# EAGLE board Qwiic_TCA9534-Panel (EAGLE 7.7.0), part 1 of 2
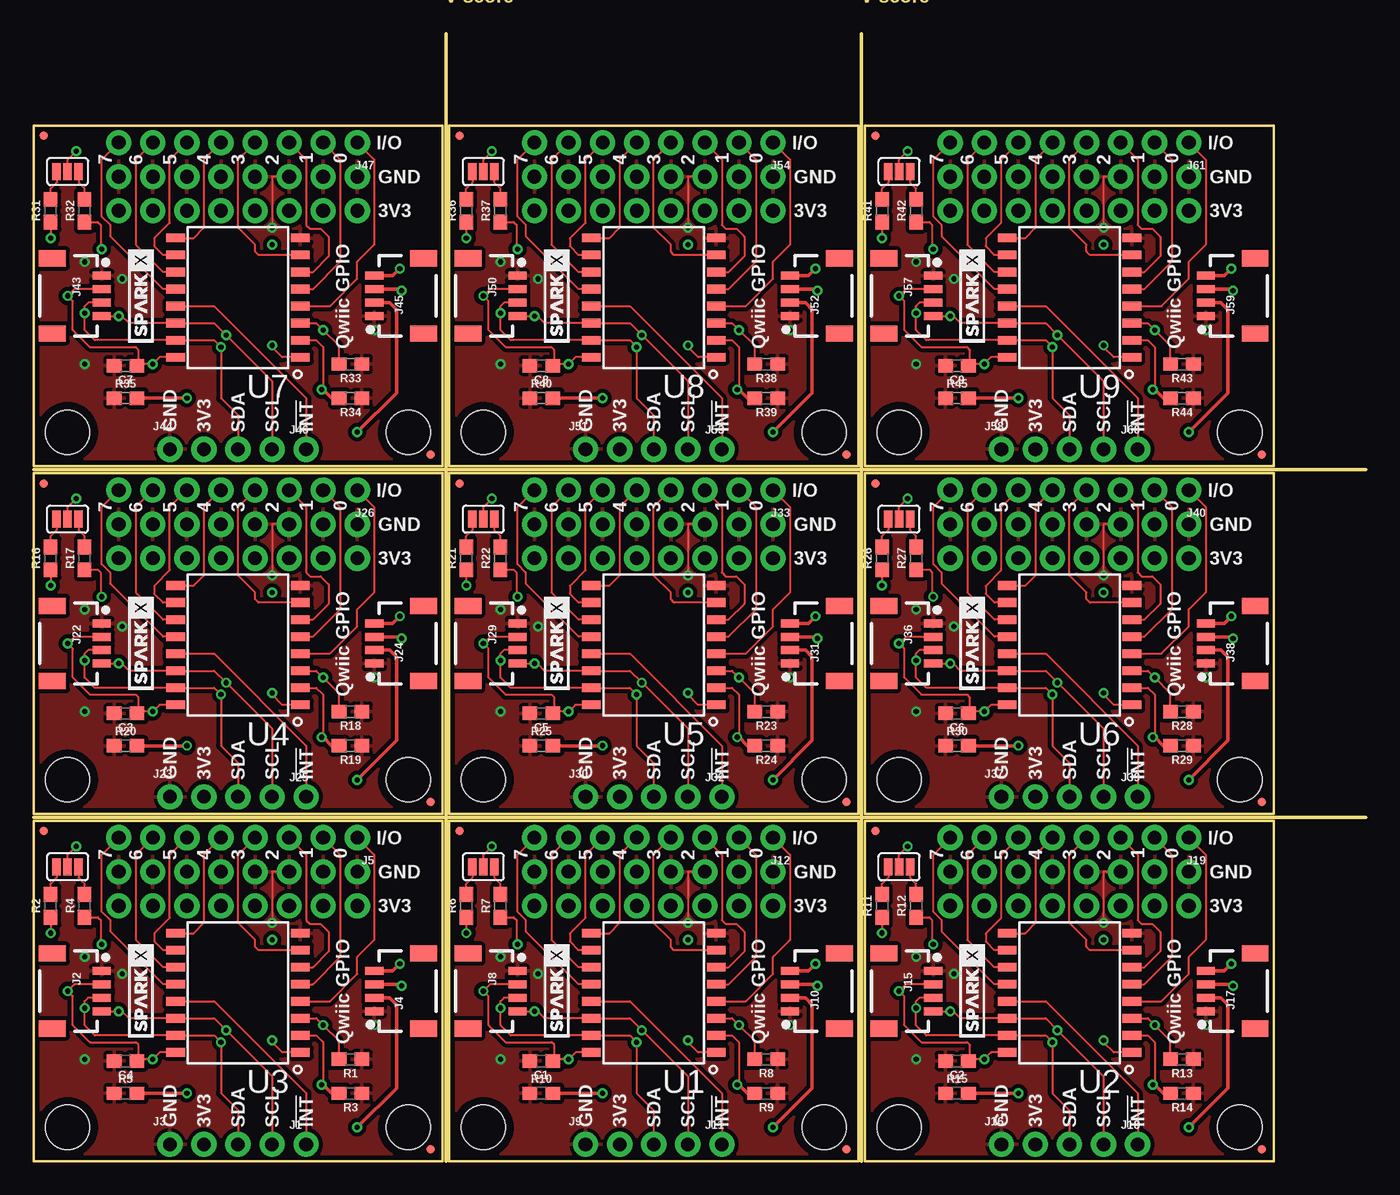
[diagram p0: board, top side]
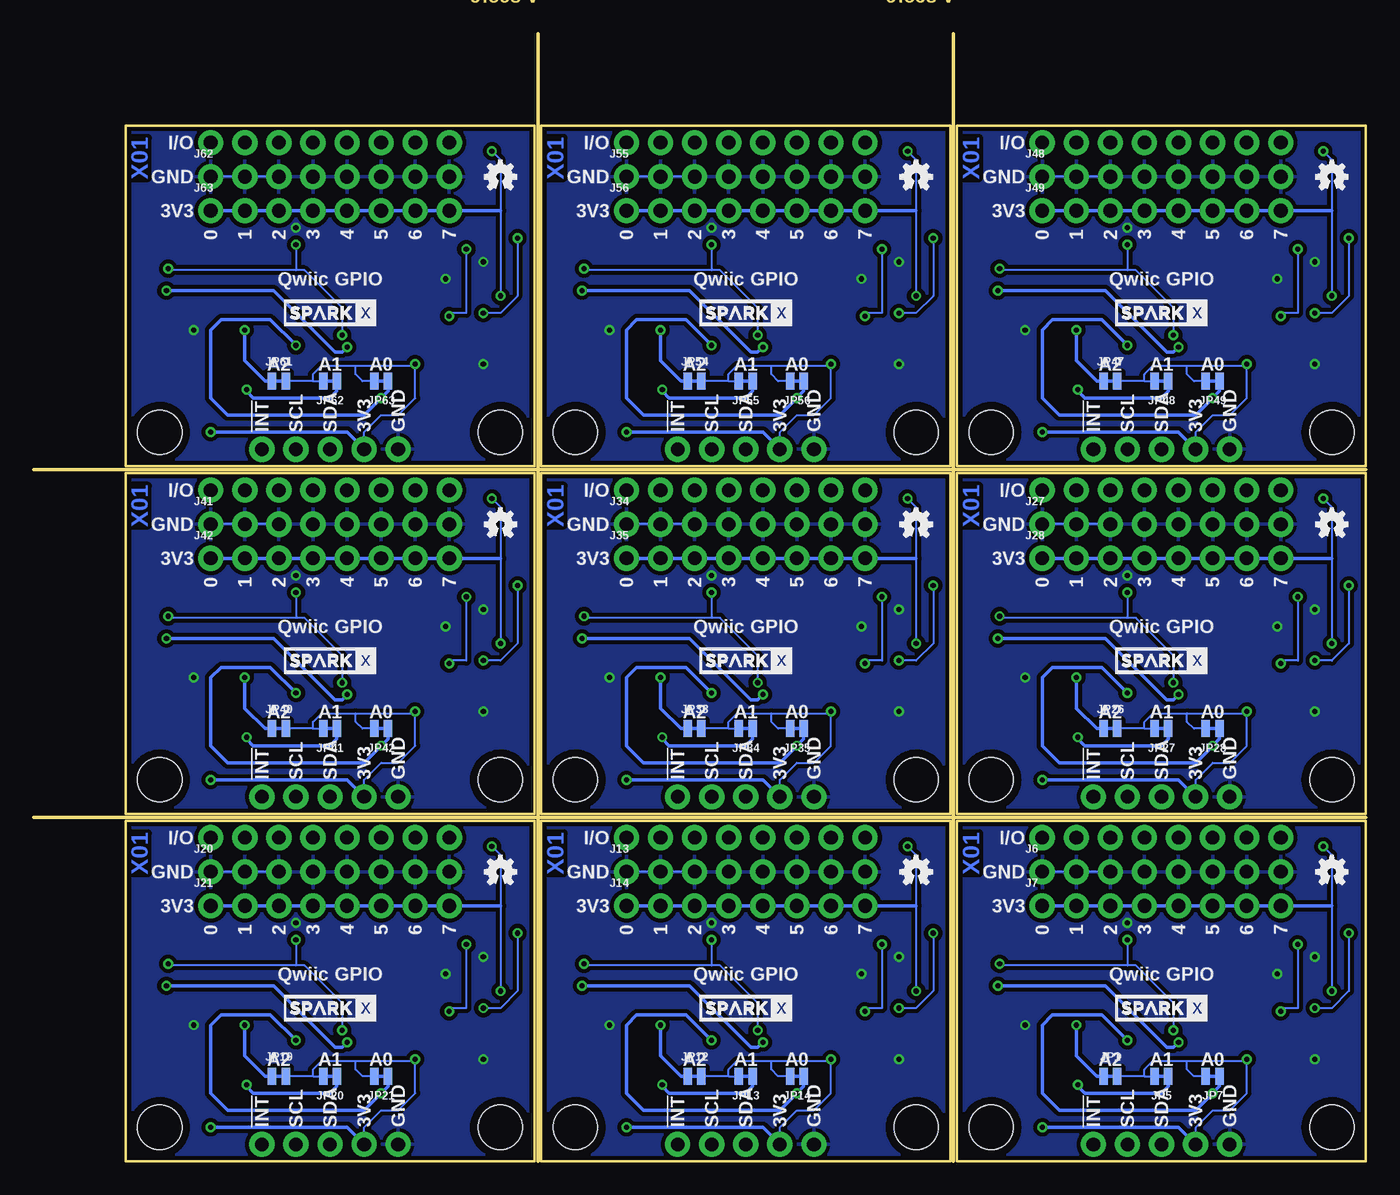
[diagram p1: board, bottom side, seen from below]

Size 99.31 x 84.07 mm. Coordinates in mm from the lower left corner, seen from the top.
Outline: 30.73,0 30.73,84.07
Outline: 61.72,0 61.72,84.07
Outline: 0,25.65 99.31,25.65
Outline: 0,51.56 99.31,51.56
Outline: 0,25.4 30.48,25.4 30.48,0 0,0 0,25.4
Outline: 30.99,25.4 61.47,25.4 61.47,0 30.99,0 30.99,25.4
Outline: 61.98,25.4 92.46,25.4 92.46,0 61.98,0 61.98,25.4
Outline: 0,51.31 30.48,51.31 30.48,25.91 0,25.91 0,51.31
Outline: 30.99,51.31 61.47,51.31 61.47,25.91 30.99,25.91 30.99,51.31
Outline: 61.98,51.31 92.46,51.31 92.46,25.91 61.98,25.91 61.98,51.31
Outline: 0,77.22 30.48,77.22 30.48,51.82 0,51.82 0,77.22
Outline: 30.99,77.22 61.47,77.22 61.47,51.82 30.99,51.82 30.99,77.22
Outline: 61.98,77.22 92.46,77.22 92.46,51.82 61.98,51.82 61.98,77.22
Copper layers (1*16): Top 0.035mm / dielectric 1.5mm / Bottom 0.035mm
Design rules "SparkFun-2-layer-PCBWay-LIMIT": minimum track width 6mil, minimum drill 0.3mm, track to track 6mil, track to pad 6mil, pad to pad 6mil, via to via 6mil, smd to smd 6mil, copper to edge 6mil, drill to drill 6mil, minimum pad ring 7mil, minimum via ring 7mil, stop-mask expansion 4mil, vias tented up to drill 25mil, thermal gap 10mil

## Footprints (pad centres in the part's own frame; a part is rotated, then mirrored left to right if it is on the bottom)
0603 = smd 1.1 x 1: 1 -0.85,0; 2 0.85,0
1X01_NO_SILK = drill 1.016 pad 1.88: 1 0,0
1X04_1MM_RA = smd 0.6 x 1.35: 1 -1.5,0; 2 -0.5,0; 3 0.5,0; 4 1.5,0 | smd 1.2 x 2: NC1 2.8,-3.675; NC2 -2.8,-3.675
1X04_NO_SILK = drill 1.016 pad 1.88: 1 0,0; 2 2.54,0; 3 5.08,0; 4 7.62,0
1X08_NO_SILK = drill 1.016 pad 1.88: 1 0,0; 2 2.54,0; 3 5.08,0; 4 7.62,0; 5 10.16,0; 6 12.7,0; 7 15.24,0; 8 17.78,0
SMT-JUMPER_2_NC_TRACE_NO-SILK = smd 0.635 x 1.27: 1 -0.508,0; 2 0.508,0
MICRO-FIDUCIAL = smd 0.635 x 0.635: 1 0,0
STAND-OFF = hole 3.302: 0,0
SMT-JUMPER_3-2-NC-PASTE_SILK_TALLER_A = smd 0.635 x 1.27: 1 -0.813,0; 2 0,0; 3 0.813,0
16SOIC = smd 1.397 x 0.648: 1 -4.65,4.445; 2 -4.65,3.175; 3 -4.65,1.905; 4 -4.65,0.635; 5 -4.65,-0.635; 6 -4.65,-1.905; 7 -4.65,-3.175; 8 -4.65,-4.445; 9 4.65,-4.445; 10 4.65,-3.175; 11 4.65,-1.905; 12 4.65,-0.635; 13 4.65,0.635; 14 4.65,1.905; 15 4.65,3.175; 16 4.65,4.445

## Placement (x,y rotation side)
C1  0.1uF  [0603]  37.85,7.49 180 top
C2  0.1uF  [0603]  68.83,7.49 180 top
C3  0.1uF  [0603]  6.86,33.4 180 top
C4  0.1uF  [0603]  6.86,7.49 180 top
C5  0.1uF  [0603]  37.85,33.4 180 top
C6  0.1uF  [0603]  68.83,33.4 180 top
C7  0.1uF  [0603]  6.86,59.31 180 top
C8  0.1uF  [0603]  37.85,59.31 180 top
C9  0.1uF  [0603]  68.83,59.31 180 top
J1  [1X01_NO_SILK]  20.32,1.27 0 top
J2  SMD  [1X04_1MM_RA]  5.08,12.7 270 top
J3  PTH  [1X04_NO_SILK]  10.16,1.27 0 top
J4  SMD  [1X04_1MM_RA]  25.4,12.7 90 top
J5  [1X08_NO_SILK]  24.13,24.13 180 top
J6  [1X08_NO_SILK]  24.13,21.59 0 bottom
J7  [1X08_NO_SILK]  24.13,19.05 0 bottom
J8  SMD  [1X04_1MM_RA]  36.07,12.7 270 top
J9  PTH  [1X04_NO_SILK]  41.15,1.27 0 top
J10  SMD  [1X04_1MM_RA]  56.39,12.7 90 top
J11  [1X01_NO_SILK]  51.31,1.27 0 top
J12  [1X08_NO_SILK]  55.12,24.13 180 top
J13  [1X08_NO_SILK]  55.12,21.59 0 bottom
J14  [1X08_NO_SILK]  55.12,19.05 0 bottom
J15  SMD  [1X04_1MM_RA]  67.06,12.7 270 top
J16  PTH  [1X04_NO_SILK]  72.14,1.27 0 top
J17  SMD  [1X04_1MM_RA]  87.38,12.7 90 top
J18  [1X01_NO_SILK]  82.3,1.27 0 top
J19  [1X08_NO_SILK]  86.11,24.13 180 top
J20  [1X08_NO_SILK]  86.11,21.59 0 bottom
J21  [1X08_NO_SILK]  86.11,19.05 0 bottom
J22  SMD  [1X04_1MM_RA]  5.08,38.61 270 top
J23  PTH  [1X04_NO_SILK]  10.16,27.18 0 top
J24  SMD  [1X04_1MM_RA]  25.4,38.61 90 top
J25  [1X01_NO_SILK]  20.32,27.18 0 top
J26  [1X08_NO_SILK]  24.13,50.04 180 top
J27  [1X08_NO_SILK]  24.13,47.5 0 bottom
J28  [1X08_NO_SILK]  24.13,44.96 0 bottom
J29  SMD  [1X04_1MM_RA]  36.07,38.61 270 top
J30  PTH  [1X04_NO_SILK]  41.15,27.18 0 top
J31  SMD  [1X04_1MM_RA]  56.39,38.61 90 top
J32  [1X01_NO_SILK]  51.31,27.18 0 top
J33  [1X08_NO_SILK]  55.12,50.04 180 top
J34  [1X08_NO_SILK]  55.12,47.5 0 bottom
J35  [1X08_NO_SILK]  55.12,44.96 0 bottom
J36  SMD  [1X04_1MM_RA]  67.06,38.61 270 top
J37  PTH  [1X04_NO_SILK]  72.14,27.18 0 top
J38  SMD  [1X04_1MM_RA]  87.38,38.61 90 top
J39  [1X01_NO_SILK]  82.3,27.18 0 top
J40  [1X08_NO_SILK]  86.11,50.04 180 top
J41  [1X08_NO_SILK]  86.11,47.5 0 bottom
J42  [1X08_NO_SILK]  86.11,44.96 0 bottom
J43  SMD  [1X04_1MM_RA]  5.08,64.52 270 top
J44  PTH  [1X04_NO_SILK]  10.16,53.09 0 top
J45  SMD  [1X04_1MM_RA]  25.4,64.52 90 top
J46  [1X01_NO_SILK]  20.32,53.09 0 top
J47  [1X08_NO_SILK]  24.13,75.95 180 top
J48  [1X08_NO_SILK]  24.13,73.41 0 bottom
J49  [1X08_NO_SILK]  24.13,70.87 0 bottom
J50  SMD  [1X04_1MM_RA]  36.07,64.52 270 top
J51  PTH  [1X04_NO_SILK]  41.15,53.09 0 top
J52  SMD  [1X04_1MM_RA]  56.39,64.52 90 top
J53  [1X01_NO_SILK]  51.31,53.09 0 top
J54  [1X08_NO_SILK]  55.12,75.95 180 top
J55  [1X08_NO_SILK]  55.12,73.41 0 bottom
J56  [1X08_NO_SILK]  55.12,70.87 0 bottom
J57  SMD  [1X04_1MM_RA]  67.06,64.52 270 top
J58  PTH  [1X04_NO_SILK]  72.14,53.09 0 top
J59  SMD  [1X04_1MM_RA]  87.38,64.52 90 top
J60  [1X01_NO_SILK]  82.3,53.09 0 top
J61  [1X08_NO_SILK]  86.11,75.95 180 top
J62  [1X08_NO_SILK]  86.11,73.41 0 bottom
J63  [1X08_NO_SILK]  86.11,70.87 0 bottom
JP1  JUMPER-SMT_2_NC_TRACE_NO-SILK  [SMT-JUMPER_2_NC_TRACE_NO-SILK]  19.05,6.35 0 bottom
JP2  FIDUCIALUFIDUCIAL  [MICRO-FIDUCIAL]  29.59,0.89 0 top
JP3  STAND-OFF  [STAND-OFF]  2.54,2.54 0 top
JP4  STAND-OFF  [STAND-OFF]  27.94,2.54 0 top
JP5  JUMPER-SMT_2_NC_TRACE_NO-SILK  [SMT-JUMPER_2_NC_TRACE_NO-SILK]  15.24,6.35 180 bottom
JP6  FIDUCIALUFIDUCIAL  [MICRO-FIDUCIAL]  0.76,24.64 0 top
JP7  JUMPER-SMT_2_NC_TRACE_NO-SILK  [SMT-JUMPER_2_NC_TRACE_NO-SILK]  11.43,6.35 180 bottom
JP8  STAND-OFF  [STAND-OFF]  33.53,2.54 0 top
JP9  STAND-OFF  [STAND-OFF]  58.93,2.54 0 top
JP10  FIDUCIALUFIDUCIAL  [MICRO-FIDUCIAL]  60.58,0.89 0 top
JP11  FIDUCIALUFIDUCIAL  [MICRO-FIDUCIAL]  31.75,24.64 0 top
JP12  JUMPER-SMT_2_NC_TRACE_NO-SILK  [SMT-JUMPER_2_NC_TRACE_NO-SILK]  50.04,6.35 0 bottom
JP13  JUMPER-SMT_2_NC_TRACE_NO-SILK  [SMT-JUMPER_2_NC_TRACE_NO-SILK]  46.23,6.35 180 bottom
JP14  JUMPER-SMT_2_NC_TRACE_NO-SILK  [SMT-JUMPER_2_NC_TRACE_NO-SILK]  42.42,6.35 180 bottom
JP15  STAND-OFF  [STAND-OFF]  64.52,2.54 0 top
JP16  STAND-OFF  [STAND-OFF]  89.92,2.54 0 top
JP17  FIDUCIALUFIDUCIAL  [MICRO-FIDUCIAL]  91.57,0.89 0 top
JP18  FIDUCIALUFIDUCIAL  [MICRO-FIDUCIAL]  62.74,24.64 0 top
JP19  JUMPER-SMT_2_NC_TRACE_NO-SILK  [SMT-JUMPER_2_NC_TRACE_NO-SILK]  81.03,6.35 0 bottom
JP20  JUMPER-SMT_2_NC_TRACE_NO-SILK  [SMT-JUMPER_2_NC_TRACE_NO-SILK]  77.22,6.35 180 bottom
JP21  JUMPER-SMT_2_NC_TRACE_NO-SILK  [SMT-JUMPER_2_NC_TRACE_NO-SILK]  73.41,6.35 180 bottom
JP22  STAND-OFF  [STAND-OFF]  2.54,28.45 0 top
JP23  STAND-OFF  [STAND-OFF]  27.94,28.45 0 top
JP24  FIDUCIALUFIDUCIAL  [MICRO-FIDUCIAL]  29.59,26.8 0 top
JP25  FIDUCIALUFIDUCIAL  [MICRO-FIDUCIAL]  0.76,50.55 0 top
JP26  JUMPER-SMT_2_NC_TRACE_NO-SILK  [SMT-JUMPER_2_NC_TRACE_NO-SILK]  19.05,32.26 0 bottom
JP27  JUMPER-SMT_2_NC_TRACE_NO-SILK  [SMT-JUMPER_2_NC_TRACE_NO-SILK]  15.24,32.26 180 bottom
JP28  JUMPER-SMT_2_NC_TRACE_NO-SILK  [SMT-JUMPER_2_NC_TRACE_NO-SILK]  11.43,32.26 180 bottom
JP29  STAND-OFF  [STAND-OFF]  33.53,28.45 0 top
JP30  STAND-OFF  [STAND-OFF]  58.93,28.45 0 top
JP31  FIDUCIALUFIDUCIAL  [MICRO-FIDUCIAL]  60.58,26.8 0 top
JP32  FIDUCIALUFIDUCIAL  [MICRO-FIDUCIAL]  31.75,50.55 0 top
JP33  JUMPER-SMT_2_NC_TRACE_NO-SILK  [SMT-JUMPER_2_NC_TRACE_NO-SILK]  50.04,32.26 0 bottom
JP34  JUMPER-SMT_2_NC_TRACE_NO-SILK  [SMT-JUMPER_2_NC_TRACE_NO-SILK]  46.23,32.26 180 bottom
JP35  JUMPER-SMT_2_NC_TRACE_NO-SILK  [SMT-JUMPER_2_NC_TRACE_NO-SILK]  42.42,32.26 180 bottom
JP36  STAND-OFF  [STAND-OFF]  64.52,28.45 0 top
JP37  STAND-OFF  [STAND-OFF]  89.92,28.45 0 top
JP38  FIDUCIALUFIDUCIAL  [MICRO-FIDUCIAL]  91.57,26.8 0 top
JP39  FIDUCIALUFIDUCIAL  [MICRO-FIDUCIAL]  62.74,50.55 0 top
JP40  JUMPER-SMT_2_NC_TRACE_NO-SILK  [SMT-JUMPER_2_NC_TRACE_NO-SILK]  81.03,32.26 0 bottom
JP41  JUMPER-SMT_2_NC_TRACE_NO-SILK  [SMT-JUMPER_2_NC_TRACE_NO-SILK]  77.22,32.26 180 bottom
JP42  JUMPER-SMT_2_NC_TRACE_NO-SILK  [SMT-JUMPER_2_NC_TRACE_NO-SILK]  73.41,32.26 180 bottom
JP43  STAND-OFF  [STAND-OFF]  2.54,54.36 0 top
JP44  STAND-OFF  [STAND-OFF]  27.94,54.36 0 top
JP45  FIDUCIALUFIDUCIAL  [MICRO-FIDUCIAL]  29.59,52.7 0 top
JP46  FIDUCIALUFIDUCIAL  [MICRO-FIDUCIAL]  0.76,76.45 0 top
JP47  JUMPER-SMT_2_NC_TRACE_NO-SILK  [SMT-JUMPER_2_NC_TRACE_NO-SILK]  19.05,58.17 0 bottom
JP48  JUMPER-SMT_2_NC_TRACE_NO-SILK  [SMT-JUMPER_2_NC_TRACE_NO-SILK]  15.24,58.17 180 bottom
JP49  JUMPER-SMT_2_NC_TRACE_NO-SILK  [SMT-JUMPER_2_NC_TRACE_NO-SILK]  11.43,58.17 180 bottom
JP50  STAND-OFF  [STAND-OFF]  33.53,54.36 0 top
JP51  STAND-OFF  [STAND-OFF]  58.93,54.36 0 top
JP52  FIDUCIALUFIDUCIAL  [MICRO-FIDUCIAL]  60.58,52.7 0 top
JP53  FIDUCIALUFIDUCIAL  [MICRO-FIDUCIAL]  31.75,76.45 0 top
JP54  JUMPER-SMT_2_NC_TRACE_NO-SILK  [SMT-JUMPER_2_NC_TRACE_NO-SILK]  50.04,58.17 0 bottom
JP55  JUMPER-SMT_2_NC_TRACE_NO-SILK  [SMT-JUMPER_2_NC_TRACE_NO-SILK]  46.23,58.17 180 bottom
JP56  JUMPER-SMT_2_NC_TRACE_NO-SILK  [SMT-JUMPER_2_NC_TRACE_NO-SILK]  42.42,58.17 180 bottom
JP57  STAND-OFF  [STAND-OFF]  64.52,54.36 0 top
JP58  STAND-OFF  [STAND-OFF]  89.92,54.36 0 top
JP59  FIDUCIALUFIDUCIAL  [MICRO-FIDUCIAL]  91.57,52.7 0 top
JP60  FIDUCIALUFIDUCIAL  [MICRO-FIDUCIAL]  62.74,76.45 0 top
JP61  JUMPER-SMT_2_NC_TRACE_NO-SILK  [SMT-JUMPER_2_NC_TRACE_NO-SILK]  81.03,58.17 0 bottom
JP62  JUMPER-SMT_2_NC_TRACE_NO-SILK  [SMT-JUMPER_2_NC_TRACE_NO-SILK]  77.22,58.17 180 bottom
JP63  JUMPER-SMT_2_NC_TRACE_NO-SILK  [SMT-JUMPER_2_NC_TRACE_NO-SILK]  73.41,58.17 180 bottom
LOGO1  OSHW-LOGOMINI  [OSHW-LOGO-MINI]  2.54,21.59 0 bottom
LOGO2  OSHW-LOGOMINI  [OSHW-LOGO-MINI]  33.53,21.59 0 bottom
LOGO3  OSHW-LOGOMINI  [OSHW-LOGO-MINI]  64.52,21.59 0 bottom
LOGO4  OSHW-LOGOMINI  [OSHW-LOGO-MINI]  2.54,47.5 0 bottom
LOGO5  OSHW-LOGOMINI  [OSHW-LOGO-MINI]  33.53,47.5 0 bottom
LOGO6  OSHW-LOGOMINI  [OSHW-LOGO-MINI]  64.52,47.5 0 bottom
LOGO7  OSHW-LOGOMINI  [OSHW-LOGO-MINI]  2.54,73.41 0 bottom
LOGO8  OSHW-LOGOMINI  [OSHW-LOGO-MINI]  33.53,73.41 0 bottom
LOGO9  OSHW-LOGOMINI  [OSHW-LOGO-MINI]  64.52,73.41 0 bottom
R1  10k  [0603]  23.62,7.62 180 top
R2  2.2k  [0603]  1.27,19.05 90 top
R3  10k  [0603]  23.62,5.08 180 top
R4  2.2k  [0603]  3.81,19.05 90 top
R5  10k  [0603]  6.86,5.08 0 top
R6  2.2k  [0603]  32.26,19.05 90 top
R7  2.2k  [0603]  34.8,19.05 90 top
R8  10k  [0603]  54.61,7.62 180 top
R9  10k  [0603]  54.61,5.08 180 top
R10  10k  [0603]  37.85,5.08 0 top
R11  2.2k  [0603]  63.25,19.05 90 top
R12  2.2k  [0603]  65.79,19.05 90 top
R13  10k  [0603]  85.6,7.62 180 top
R14  10k  [0603]  85.6,5.08 180 top
R15  10k  [0603]  68.83,5.08 0 top
R16  2.2k  [0603]  1.27,44.96 90 top
R17  2.2k  [0603]  3.81,44.96 90 top
R18  10k  [0603]  23.62,33.53 180 top
R19  10k  [0603]  23.62,30.99 180 top
R20  10k  [0603]  6.86,30.99 0 top
R21  2.2k  [0603]  32.26,44.96 90 top
R22  2.2k  [0603]  34.8,44.96 90 top
R23  10k  [0603]  54.61,33.53 180 top
R24  10k  [0603]  54.61,30.99 180 top
R25  10k  [0603]  37.85,30.99 0 top
R26  2.2k  [0603]  63.25,44.96 90 top
R27  2.2k  [0603]  65.79,44.96 90 top
R28  10k  [0603]  85.6,33.53 180 top
R29  10k  [0603]  85.6,30.99 180 top
R30  10k  [0603]  68.83,30.99 0 top
R31  2.2k  [0603]  1.27,70.87 90 top
R32  2.2k  [0603]  3.81,70.87 90 top
R33  10k  [0603]  23.62,59.44 180 top
R34  10k  [0603]  23.62,56.9 180 top
R35  10k  [0603]  6.86,56.9 0 top
R36  2.2k  [0603]  32.26,70.87 90 top
R37  2.2k  [0603]  34.8,70.87 90 top
R38  10k  [0603]  54.61,59.44 180 top
R39  10k  [0603]  54.61,56.9 180 top
R40  10k  [0603]  37.85,56.9 0 top
R41  2.2k  [0603]  63.25,70.87 90 top
R42  2.2k  [0603]  65.79,70.87 90 top
R43  10k  [0603]  85.6,59.44 180 top
R44  10k  [0603]  85.6,56.9 180 top
R45  10k  [0603]  68.83,56.9 0 top
SJ1  SMT-JUMPER-_3-2-NC-PASTE_TALL  [SMT-JUMPER_3-2-NC-PASTE_SILK_TALLER_A]  33.53,21.97 0 top
SJ2  SMT-JUMPER-_3-2-NC-PASTE_TALL  [SMT-JUMPER_3-2-NC-PASTE_SILK_TALLER_A]  64.52,21.97 0 top
SJ3  SMT-JUMPER-_3-2-NC-PASTE_TALL  [SMT-JUMPER_3-2-NC-PASTE_SILK_TALLER_A]  2.54,47.88 0 top
SJ4  SMT-JUMPER-_3-2-NC-PASTE_TALL  [SMT-JUMPER_3-2-NC-PASTE_SILK_TALLER_A]  33.53,47.88 0 top
SJ5  SMT-JUMPER-_3-2-NC-PASTE_TALL  [SMT-JUMPER_3-2-NC-PASTE_SILK_TALLER_A]  2.54,21.97 0 top
SJ6  SMT-JUMPER-_3-2-NC-PASTE_TALL  [SMT-JUMPER_3-2-NC-PASTE_SILK_TALLER_A]  64.52,47.88 0 top
SJ7  SMT-JUMPER-_3-2-NC-PASTE_TALL  [SMT-JUMPER_3-2-NC-PASTE_SILK_TALLER_A]  2.54,73.79 0 top
SJ8  SMT-JUMPER-_3-2-NC-PASTE_TALL  [SMT-JUMPER_3-2-NC-PASTE_SILK_TALLER_A]  33.53,73.79 0 top
SJ9  SMT-JUMPER-_3-2-NC-PASTE_TALL  [SMT-JUMPER_3-2-NC-PASTE_SILK_TALLER_A]  64.52,73.79 0 top
U1  TCA9534U  [16SOIC]  46.23,12.57 180 top
U2  TCA9534U  [16SOIC]  77.22,12.57 180 top
U3  TCA9534U  [16SOIC]  15.24,12.57 180 top
U4  TCA9534U  [16SOIC]  15.24,38.48 180 top
U5  TCA9534U  [16SOIC]  46.23,38.48 180 top
U6  TCA9534U  [16SOIC]  77.22,38.48 180 top
U7  TCA9534U  [16SOIC]  15.24,64.39 180 top
U8  TCA9534U  [16SOIC]  46.23,64.39 180 top
U9  TCA9534U  [16SOIC]  77.22,64.39 180 top
U$1  SPARKX-LOGO3  [SPARKX-SMALL]  15.24,11.43 0 bottom
U$2  SPARKX-LOGO3  [SPARKX-SMALL]  8,12.7 90 top
U$3  SPARKX-LOGO3  [SPARKX-SMALL]  38.99,12.7 90 top
U$4  SPARKX-LOGO3  [SPARKX-SMALL]  46.23,11.43 0 bottom
U$5  SPARKX-LOGO3  [SPARKX-SMALL]  69.98,12.7 90 top
U$6  SPARKX-LOGO3  [SPARKX-SMALL]  77.22,11.43 0 bottom
U$7  SPARKX-LOGO3  [SPARKX-SMALL]  8,38.61 90 top
U$8  SPARKX-LOGO3  [SPARKX-SMALL]  15.24,37.34 0 bottom
U$9  SPARKX-LOGO3  [SPARKX-SMALL]  38.99,38.61 90 top
U$10  SPARKX-LOGO3  [SPARKX-SMALL]  46.23,37.34 0 bottom
U$11  SPARKX-LOGO3  [SPARKX-SMALL]  69.98,38.61 90 top
U$12  SPARKX-LOGO3  [SPARKX-SMALL]  77.22,37.34 0 bottom
U$13  SPARKX-LOGO3  [SPARKX-SMALL]  8,64.52 90 top
U$14  SPARKX-LOGO3  [SPARKX-SMALL]  15.24,63.25 0 bottom
U$15  SPARKX-LOGO3  [SPARKX-SMALL]  38.99,64.52 90 top
U$16  SPARKX-LOGO3  [SPARKX-SMALL]  46.23,63.25 0 bottom
U$17  SPARKX-LOGO3  [SPARKX-SMALL]  69.98,64.52 90 top
U$18  SPARKX-LOGO3  [SPARKX-SMALL]  77.22,63.25 0 bottom

## Library data of the parts
C1-C9 = SparkFun-Capacitors; PROD_ID: CAP-00810
J1 J11 J18 J25 J32 J39 J46 J53 J60 = SparkFun-Connectors
J2-J4 J8-J10 J15-J17 J22-J24 J29-J31 J36-J38 J43-J45 J50-J52 J57-J59 U$1-U$18 = SparkX
J5-J7 J12-J14 J19-J21 J26-J28 J33-J35 J40-J42 J47-J49 J54-J56 J61-J63 = SparkFun-Connectors; PROD_ID: CONN-08438
JP1 JP5 JP7 JP12-JP14 JP19-JP21 JP26-JP28 JP33-JP35 JP40-JP42 JP47-JP49 JP54-JP56 JP61-JP63 = SparkFun-Jumpers
JP2-JP4 JP6 JP8-JP11 JP15-JP18 JP22-JP25 JP29-JP32 JP36-JP39 JP43-JP46 JP50-JP53 JP57-JP60 = SparkFun
LOGO1-LOGO9 = SparkFun-Aesthetics
R1-R45 = SparkFun-Resistors; PROD_ID: RES-08272
SJ1-SJ9 U1-U9 = KevinKuwata_eagle

## Nets
3.3V: C4.1 J2.2 J3.2 J4.2 J7.1 J7.2 J7.3 J7.4 J7.5 J7.6 J7.7 J7.8 JP1.2 JP5.2 JP7.2 SJ5.2 U3.16
3.3V1: C1.1 J8.2 J9.2 J10.2 J14.1 J14.2 J14.3 J14.4 J14.5 J14.6 J14.7 J14.8 JP12.2 JP13.2 JP14.2 SJ1.2 U1.16
3.3V2: C2.1 J15.2 J16.2 J17.2 J21.1 J21.2 J21.3 J21.4 J21.5 J21.6 J21.7 J21.8 JP19.2 JP20.2 JP21.2 SJ2.2 U2.16
3.3V3: C3.1 J22.2 J23.2 J24.2 J28.1 J28.2 J28.3 J28.4 J28.5 J28.6 J28.7 J28.8 JP26.2 JP27.2 JP28.2 SJ3.2 U4.16
3.3V4: C5.1 J29.2 J30.2 J31.2 J35.1 J35.2 J35.3 J35.4 J35.5 J35.6 J35.7 J35.8 JP33.2 JP34.2 JP35.2 SJ4.2 U5.16
3.3V5: C6.1 J36.2 J37.2 J38.2 J42.1 J42.2 J42.3 J42.4 J42.5 J42.6 J42.7 J42.8 JP40.2 JP41.2 JP42.2 SJ6.2 U6.16
3.3V6: C7.1 J43.2 J44.2 J45.2 J49.1 J49.2 J49.3 J49.4 J49.5 J49.6 J49.7 J49.8 JP47.2 JP48.2 JP49.2 SJ7.2 U7.16
3.3V7: C8.1 J50.2 J51.2 J52.2 J56.1 J56.2 J56.3 J56.4 J56.5 J56.6 J56.7 J56.8 JP54.2 JP55.2 JP56.2 SJ8.2 U8.16
3.3V8: C9.1 J57.2 J58.2 J59.2 J63.1 J63.2 J63.3 J63.4 J63.5 J63.6 J63.7 J63.8 JP61.2 JP62.2 JP63.2 SJ9.2 U9.16
!INT: J1.1 U3.13
!INT1: J11.1 U1.13
!INT2: J18.1 U2.13
!INT3: J25.1 U4.13
!INT4: J32.1 U5.13
!INT5: J39.1 U6.13
!INT6: J46.1 U7.13
!INT7: J53.1 U8.13
!INT8: J60.1 U9.13
A0: JP7.1 R5.2 U3.1
A1: JP5.1 R3.2 U3.2
A2: JP1.1 R1.2 U3.3
A3: JP14.1 R10.2 U1.1
A4: JP13.1 R9.2 U1.2
A5: JP12.1 R8.2 U1.3
A6: JP21.1 R15.2 U2.1
A7: JP20.1 R14.2 U2.2
A8: JP19.1 R13.2 U2.3
A9: JP28.1 R20.2 U4.1
A10: JP27.1 R19.2 U4.2
A11: JP26.1 R18.2 U4.3
A12: JP35.1 R25.2 U5.1
A13: JP34.1 R24.2 U5.2
A14: JP33.1 R23.2 U5.3
A15: JP42.1 R30.2 U6.1
A16: JP41.1 R29.2 U6.2
A17: JP40.1 R28.2 U6.3
A18: JP49.1 R35.2 U7.1
A19: JP48.1 R34.2 U7.2
A20: JP47.1 R33.2 U7.3
A21: JP56.1 R40.2 U8.1
A22: JP55.1 R39.2 U8.2
A23: JP54.1 R38.2 U8.3
A24: JP63.1 R45.2 U9.1
A25: JP62.1 R44.2 U9.2
A26: JP61.1 R43.2 U9.3
GND: C4.2 J2.1 J3.1 J4.1 J6.1 J6.2 J6.3 J6.4 J6.5 J6.6 J6.7 J6.8 R1.1 R3.1 R5.1 U3.8
GND1: C1.2 J8.1 J9.1 J10.1 J13.1 J13.2 J13.3 J13.4 J13.5 J13.6 J13.7 J13.8 R8.1 R9.1 R10.1 U1.8
GND2: C2.2 J15.1 J16.1 J17.1 J20.1 J20.2 J20.3 J20.4 J20.5 J20.6 J20.7 J20.8 R13.1 R14.1 R15.1 U2.8
GND3: C3.2 J22.1 J23.1 J24.1 J27.1 J27.2 J27.3 J27.4 J27.5 J27.6 J27.7 J27.8 R18.1 R19.1 R20.1 U4.8
GND4: C5.2 J29.1 J30.1 J31.1 J34.1 J34.2 J34.3 J34.4 J34.5 J34.6 J34.7 J34.8 R23.1 R24.1 R25.1 U5.8
GND5: C6.2 J36.1 J37.1 J38.1 J41.1 J41.2 J41.3 J41.4 J41.5 J41.6 J41.7 J41.8 R28.1 R29.1 R30.1 U6.8
GND6: C7.2 J43.1 J44.1 J45.1 J48.1 J48.2 J48.3 J48.4 J48.5 J48.6 J48.7 J48.8 R33.1 R34.1 R35.1 U7.8
GND7: C8.2 J50.1 J51.1 J52.1 J55.1 J55.2 J55.3 J55.4 J55.5 J55.6 J55.7 J55.8 R38.1 R39.1 R40.1 U8.8
GND8: C9.2 J57.1 J58.1 J59.1 J62.1 J62.2 J62.3 J62.4 J62.5 J62.6 J62.7 J62.8 R43.1 R44.1 R45.1 U9.8
P0: J5.1 U3.4
P1: J5.2 U3.5
P2: J5.3 U3.6
P3: J5.4 U3.7
P4: J5.5 U3.9
P5: J5.6 U3.10
P6: J5.7 U3.11
P7: J5.8 U3.12
P8: J12.1 U1.4
P9: J12.3 U1.6
P10: J12.4 U1.7
P11: J12.5 U1.9
P12: J12.6 U1.10
P13: J12.7 U1.11
P14: J12.8 U1.12
P15: J12.2 U1.5
P16: J19.1 U2.4
P17: J19.3 U2.6
P18: J19.4 U2.7
P19: J19.5 U2.9
P20: J19.6 U2.10
P21: J19.7 U2.11
P22: J19.8 U2.12
P23: J19.2 U2.5
P24: J26.1 U4.4
P25: J26.3 U4.6
P26: J26.4 U4.7
P27: J26.5 U4.9
P28: J26.6 U4.10
P29: J26.7 U4.11
P30: J26.8 U4.12
P31: J26.2 U4.5
P32: J33.1 U5.4
P33: J33.3 U5.6
P34: J33.4 U5.7
P35: J33.5 U5.9
P36: J33.6 U5.10
P37: J33.7 U5.11
P38: J33.8 U5.12
P39: J33.2 U5.5
P40: J40.1 U6.4
P41: J40.3 U6.6
P42: J40.4 U6.7
P43: J40.5 U6.9
P44: J40.6 U6.10
P45: J40.7 U6.11
P46: J40.8 U6.12
P47: J40.2 U6.5
P48: J47.1 U7.4
P49: J47.3 U7.6
P50: J47.4 U7.7
P51: J47.5 U7.9
P52: J47.6 U7.10
P53: J47.7 U7.11
P54: J47.8 U7.12
P55: J47.2 U7.5
P56: J54.1 U8.4
P57: J54.3 U8.6
P58: J54.4 U8.7
P59: J54.5 U8.9
P60: J54.6 U8.10
P61: J54.7 U8.11
P62: J54.8 U8.12
P63: J54.2 U8.5
P64: J61.1 U9.4
P65: J61.3 U9.6
P66: J61.4 U9.7
P67: J61.5 U9.9
P68: J61.6 U9.10
P69: J61.7 U9.11
P70: J61.8 U9.12
P71: J61.2 U9.5
SCL: J2.4 J3.4 J4.4 R4.1 U3.14
SCL1: J8.4 J9.4 J10.4 R7.1 U1.14
SCL2: J15.4 J16.4 J17.4 R12.1 U2.14
SCL3: J22.4 J23.4 J24.4 R17.1 U4.14
SCL4: J29.4 J30.4 J31.4 R22.1 U5.14
SCL5: J36.4 J37.4 J38.4 R27.1 U6.14
SCL6: J43.4 J44.4 J45.4 R32.1 U7.14
SCL7: J50.4 J51.4 J52.4 R37.1 U8.14
SCL8: J57.4 J58.4 J59.4 R42.1 U9.14
SCL_PU1: R2.2 SJ5.1
SCL_PU2: R6.2 SJ1.1
SCL_PU3: R11.2 SJ2.1
SCL_PU4: R16.2 SJ3.1
SCL_PU5: R21.2 SJ4.1
SCL_PU6: R26.2 SJ6.1
SCL_PU7: R31.2 SJ7.1
SCL_PU8: R36.2 SJ8.1
SCL_PU9: R41.2 SJ9.1
SDA: J2.3 J3.3 J4.3 R2.1 U3.15
SDA1: J8.3 J9.3 J10.3 R6.1 U1.15
SDA2: J15.3 J16.3 J17.3 R11.1 U2.15
SDA3: J22.3 J23.3 J24.3 R16.1 U4.15
SDA4: J29.3 J30.3 J31.3 R21.1 U5.15
SDA5: J36.3 J37.3 J38.3 R26.1 U6.15
SDA6: J43.3 J44.3 J45.3 R31.1 U7.15
SDA7: J50.3 J51.3 J52.3 R36.1 U8.15
SDA8: J57.3 J58.3 J59.3 R41.1 U9.15
SDA_PU1: R4.2 SJ5.3
SDA_PU2: R7.2 SJ1.3
SDA_PU3: R12.2 SJ2.3
SDA_PU4: R17.2 SJ3.3
SDA_PU5: R22.2 SJ4.3
SDA_PU6: R27.2 SJ6.3
SDA_PU7: R32.2 SJ7.3
SDA_PU8: R37.2 SJ8.3
SDA_PU9: R42.2 SJ9.3

## Tracks (layer width: path | path; a pad name or v marks a point on that pad's centre or on a via)
3.3V  (via drill 0.38)
  Top 0.152: SJ5.2 2.54,22.86 v3.17,23.5 | J2.2 3.04,13.2 v2.54,12.7 2.92,12.32 2.92,10.16 4.19,8.89 7.62,8.89 7.83,8.68 7.83,7.62 | 7.83,7.62 v8.89,7.62 9.4,8.13 U3.16 | 7.83,7.62 C4.1
  Top 0.254: J4.2 26.54,12.2 27.05,11.68 27.05,5.46 v24.13,2.54
  Bottom 0.152: v3.17,23.5 2.54,22.86 2.54,19.05 v2.54,12.7 | 11.43,6.35 JP7.2 12.83,6.35 13.34,6.86 13.34,7.49 | 16.51,6.35 JP5.2 | 16.51,6.35 16.51,6.86 15.88,7.49 13.34,7.49 | 16.51,6.35 JP1.2 | J3.2 12.7,2.54 11.43,3.81 10.16,3.81 8.89,5.08 v8.89,7.62 9.02,7.49 13.34,7.49
  Bottom 0.254: J3.2 13.97,2.54 v24.13,2.54 | J7.1 J7.2 J7.3 J7.4 J7.5 J7.6 J7.7 J7.8 2.54,19.05
3.3V1  (via drill 0.38)
  Top 0.152: SJ1.2 33.53,22.86 v34.16,23.5 | J8.2 34.03,13.2 v33.53,12.7 33.91,12.32 33.91,10.16 35.18,8.89 38.61,8.89 38.82,8.68 38.82,7.62 | 38.82,7.62 v39.88,7.62 40.39,8.13 U1.16 | 38.82,7.62 C1.1
  Top 0.254: J10.2 57.52,12.2 58.04,11.68 58.04,5.46 v55.12,2.54
  Bottom 0.152: v34.16,23.5 33.53,22.86 33.53,19.05 v33.53,12.7 | 42.42,6.35 JP14.2 43.81,6.35 44.32,6.86 44.32,7.49 | 47.5,6.35 JP13.2 | 47.5,6.35 47.5,6.86 46.86,7.49 44.32,7.49 | 47.5,6.35 JP12.2 | J9.2 43.69,2.54 42.42,3.81 41.15,3.81 39.88,5.08 v39.88,7.62 40.01,7.49 44.32,7.49
  Bottom 0.254: J9.2 44.96,2.54 v55.12,2.54 | J14.1 J14.2 J14.3 J14.4 J14.5 J14.6 J14.7 J14.8 33.53,19.05
3.3V2  (via drill 0.38)
  Top 0.152: SJ2.2 64.52,22.86 v65.15,23.5 | J15.2 65.02,13.2 v64.52,12.7 64.9,12.32 64.9,10.16 66.17,8.89 69.6,8.89 69.81,8.68 69.81,7.62 | 69.81,7.62 v70.87,7.62 71.37,8.13 U2.16 | 69.81,7.62 C2.1
  Top 0.254: J17.2 88.51,12.2 89.03,11.68 89.03,5.46 v86.11,2.54
  Bottom 0.152: v65.15,23.5 64.52,22.86 64.52,19.05 v64.52,12.7 | 73.41,6.35 JP21.2 74.8,6.35 75.31,6.86 75.31,7.49 | 78.49,6.35 JP20.2 | 78.49,6.35 78.49,6.86 77.85,7.49 75.31,7.49 | 78.49,6.35 JP19.2 | J16.2 74.68,2.54 73.41,3.81 72.14,3.81 70.87,5.08 v70.87,7.62 70.99,7.49 75.31,7.49
  Bottom 0.254: J16.2 75.95,2.54 v86.11,2.54 | J21.1 J21.2 J21.3 J21.4 J21.5 J21.6 J21.7 J21.8 64.52,19.05
3.3V3  (via drill 0.38)
  Top 0.152: SJ3.2 2.54,48.77 v3.17,49.4 | J22.2 3.04,39.11 v2.54,38.61 2.92,38.23 2.92,36.07 4.19,34.8 7.62,34.8 7.83,34.58 7.83,33.53 | 7.83,33.53 v8.89,33.53 9.4,34.04 U4.16 | 7.83,33.53 C3.1
  Top 0.254: J24.2 26.54,38.11 27.05,37.59 27.05,31.37 v24.13,28.45
  Bottom 0.152: v3.17,49.4 2.54,48.77 2.54,44.96 v2.54,38.61 | 11.43,32.26 JP28.2 12.83,32.26 13.34,32.77 13.34,33.4 | 16.51,32.26 JP27.2 | 16.51,32.26 16.51,32.77 15.88,33.4 13.34,33.4 | 16.51,32.26 JP26.2 | J23.2 12.7,28.45 11.43,29.72 10.16,29.72 8.89,30.99 v8.89,33.53 9.02,33.4 13.34,33.4
  Bottom 0.254: J23.2 13.97,28.45 v24.13,28.45 | J28.1 J28.2 J28.3 J28.4 J28.5 J28.6 J28.7 J28.8 2.54,44.96
3.3V4  (via drill 0.38)
  Top 0.152: SJ4.2 33.53,48.77 v34.16,49.4 | J29.2 34.03,39.11 v33.53,38.61 33.91,38.23 33.91,36.07 35.18,34.8 38.61,34.8 38.82,34.58 38.82,33.53 | 38.82,33.53 v39.88,33.53 40.39,34.04 U5.16 | 38.82,33.53 C5.1
  Top 0.254: J31.2 57.52,38.11 58.04,37.59 58.04,31.37 v55.12,28.45
  Bottom 0.152: v34.16,49.4 33.53,48.77 33.53,44.96 v33.53,38.61 | 42.42,32.26 JP35.2 43.81,32.26 44.32,32.77 44.32,33.4 | 47.5,32.26 JP34.2 | 47.5,32.26 47.5,32.77 46.86,33.4 44.32,33.4 | 47.5,32.26 JP33.2 | J30.2 43.69,28.45 42.42,29.72 41.15,29.72 39.88,30.99 v39.88,33.53 40.01,33.4 44.32,33.4
  Bottom 0.254: J30.2 44.96,28.45 v55.12,28.45 | J35.1 J35.2 J35.3 J35.4 J35.5 J35.6 J35.7 J35.8 33.53,44.96
3.3V5  (via drill 0.38)
  Top 0.152: SJ6.2 64.52,48.77 v65.15,49.4 | J36.2 65.02,39.11 v64.52,38.61 64.9,38.23 64.9,36.07 66.17,34.8 69.6,34.8 69.81,34.58 69.81,33.53 | 69.81,33.53 v70.87,33.53 71.37,34.04 U6.16 | 69.81,33.53 C6.1
  Top 0.254: J38.2 88.51,38.11 89.03,37.59 89.03,31.37 v86.11,28.45
  Bottom 0.152: v65.15,49.4 64.52,48.77 64.52,44.96 v64.52,38.61 | 73.41,32.26 JP42.2 74.8,32.26 75.31,32.77 75.31,33.4 | 78.49,32.26 JP41.2 | 78.49,32.26 78.49,32.77 77.85,33.4 75.31,33.4 | 78.49,32.26 JP40.2 | J37.2 74.68,28.45 73.41,29.72 72.14,29.72 70.87,30.99 v70.87,33.53 70.99,33.4 75.31,33.4
  Bottom 0.254: J37.2 75.95,28.45 v86.11,28.45 | J42.1 J42.2 J42.3 J42.4 J42.5 J42.6 J42.7 J42.8 64.52,44.96
3.3V6  (via drill 0.38)
  Top 0.152: SJ7.2 2.54,74.68 v3.17,75.31 | J43.2 3.04,65.02 v2.54,64.52 2.92,64.14 2.92,61.98 4.19,60.71 7.62,60.71 7.83,60.49 7.83,59.44 | 7.83,59.44 v8.89,59.44 9.4,59.94 U7.16 | 7.83,59.44 C7.1
  Top 0.254: J45.2 26.54,64.02 27.05,63.5 27.05,57.28 v24.13,54.36
  Bottom 0.152: v3.17,75.31 2.54,74.68 2.54,70.87 v2.54,64.52 | 11.43,58.17 JP49.2 12.83,58.17 13.34,58.67 13.34,59.31 | 16.51,58.17 JP48.2 | 16.51,58.17 16.51,58.67 15.88,59.31 13.34,59.31 | 16.51,58.17 JP47.2 | J44.2 12.7,54.36 11.43,55.63 10.16,55.63 8.89,56.9 v8.89,59.44 9.02,59.31 13.34,59.31
  Bottom 0.254: J44.2 13.97,54.36 v24.13,54.36 | J49.1 J49.2 J49.3 J49.4 J49.5 J49.6 J49.7 J49.8 2.54,70.87
3.3V7  (via drill 0.38)
  Top 0.152: SJ8.2 33.53,74.68 v34.16,75.31 | J50.2 34.03,65.02 v33.53,64.52 33.91,64.14 33.91,61.98 35.18,60.71 38.61,60.71 38.82,60.49 38.82,59.44 | 38.82,59.44 v39.88,59.44 40.39,59.94 U8.16 | 38.82,59.44 C8.1
  Top 0.254: J52.2 57.52,64.02 58.04,63.5 58.04,57.28 v55.12,54.36
  Bottom 0.152: v34.16,75.31 33.53,74.68 33.53,70.87 v33.53,64.52 | 42.42,58.17 JP56.2 43.81,58.17 44.32,58.67 44.32,59.31 | 47.5,58.17 JP55.2 | 47.5,58.17 47.5,58.67 46.86,59.31 44.32,59.31 | 47.5,58.17 JP54.2 | J51.2 43.69,54.36 42.42,55.63 41.15,55.63 39.88,56.9 v39.88,59.44 40.01,59.31 44.32,59.31
  Bottom 0.254: J51.2 44.96,54.36 v55.12,54.36 | J56.1 J56.2 J56.3 J56.4 J56.5 J56.6 J56.7 J56.8 33.53,70.87
3.3V8  (via drill 0.38)
  Top 0.152: SJ9.2 64.52,74.68 v65.15,75.31 | J57.2 65.02,65.02 v64.52,64.52 64.9,64.14 64.9,61.98 66.17,60.71 69.6,60.71 69.81,60.49 69.81,59.44 | 69.81,59.44 v70.87,59.44 71.37,59.94 U9.16 | 69.81,59.44 C9.1
  Top 0.254: J59.2 88.51,64.02 89.03,63.5 89.03,57.28 v86.11,54.36
  Bottom 0.152: v65.15,75.31 64.52,74.68 64.52,70.87 v64.52,64.52 | 73.41,58.17 JP63.2 74.8,58.17 75.31,58.67 75.31,59.31 | 78.49,58.17 JP62.2 | 78.49,58.17 78.49,58.67 77.85,59.31 75.31,59.31 | 78.49,58.17 JP61.2 | J58.2 74.68,54.36 73.41,55.63 72.14,55.63 70.87,56.9 v70.87,59.44 70.99,59.31 75.31,59.31
  Bottom 0.254: J58.2 75.95,54.36 v86.11,54.36 | J63.1 J63.2 J63.3 J63.4 J63.5 J63.6 J63.7 J63.8 64.52,70.87
!INT
  Top 0.152: U3.13 13.46,11.94 20.32,5.08 J1.1
!INT1
  Top 0.152: U1.13 44.45,11.94 51.31,5.08 J11.1
!INT2
  Top 0.152: U2.13 75.44,11.94 82.3,5.08 J18.1
!INT3
  Top 0.152: U4.13 13.46,37.85 20.32,30.99 J25.1
!INT4
  Top 0.152: U5.13 44.45,37.85 51.31,30.99 J32.1
!INT5
  Top 0.152: U6.13 75.44,37.85 82.3,30.99 J39.1
!INT6
  Top 0.152: U7.13 13.46,63.75 20.32,56.9 J46.1
!INT7
  Top 0.152: U8.13 44.45,63.75 51.31,56.9 J53.1
!INT8
  Top 0.152: U9.13 75.44,63.75 82.3,56.9 J60.1
A0  (via drill 0.38)
  Top 0.152: U3.1 18.54,8.13 17.78,8.89 v17.78,9.02
  Top 0.254: v11.43,5.08 R5.2
  Bottom 0.254: v17.78,9.02 19.68,10.92 23.37,10.92 24.13,10.16 24.13,5.08 22.86,3.81 12.7,3.81 v11.43,5.08 10.92,5.59 JP7.1
A1  (via drill 0.38)
  Top 0.152: U3.2 21.08,9.4 21.59,8.89 21.59,5.84 v21.46,5.71
  Top 0.254: R3.2 22.23,5.08 21.59,5.71 v21.46,5.71
  Bottom 0.254: v21.46,5.71 21.46,5.59 20.95,5.08 15.24,5.08 14.73,5.59 JP5.1
A2  (via drill 0.38)
  Top 0.152: U3.3 21.08,10.67 v21.59,10.16 22.77,8.98 R1.2
  Bottom 0.254: JP1.1 20.07,6.35 21.59,7.87 v21.59,10.16
A3  (via drill 0.38)
  Top 0.152: U1.1 49.53,8.13 48.77,8.89 v48.77,9.02
  Top 0.254: v42.42,5.08 R10.2
  Bottom 0.254: v48.77,9.02 50.67,10.92 54.36,10.92 55.12,10.16 55.12,5.08 53.85,3.81 43.69,3.81 v42.42,5.08 41.91,5.59 JP14.1
A4  (via drill 0.38)
  Top 0.152: U1.2 52.07,9.4 52.58,8.89 52.58,5.84 v52.45,5.71
  Top 0.254: R9.2 53.21,5.08 52.58,5.71 v52.45,5.71
  Bottom 0.254: v52.45,5.71 52.45,5.59 51.94,5.08 46.23,5.08 45.72,5.59 JP13.1
A5  (via drill 0.38)
  Top 0.152: U1.3 52.07,10.67 v52.58,10.16 53.76,8.98 R8.2
  Bottom 0.254: JP12.1 51.05,6.35 52.58,7.87 v52.58,10.16
A6  (via drill 0.38)
  Top 0.152: U2.1 80.52,8.13 79.76,8.89 v79.76,9.02
  Top 0.254: v73.41,5.08 R15.2
  Bottom 0.254: v79.76,9.02 81.66,10.92 85.34,10.92 86.11,10.16 86.11,5.08 84.84,3.81 74.68,3.81 v73.41,5.08 72.9,5.59 JP21.1
A7  (via drill 0.38)
  Top 0.152: U2.2 83.06,9.4 83.57,8.89 83.57,5.84 v83.44,5.71
  Top 0.254: R14.2 84.2,5.08 83.57,5.71 v83.44,5.71
  Bottom 0.254: v83.44,5.71 83.44,5.59 82.93,5.08 77.22,5.08 76.71,5.59 JP20.1
A8  (via drill 0.38)
  Top 0.152: U2.3 83.06,10.67 v83.57,10.16 84.75,8.98 R13.2
  Bottom 0.254: JP19.1 82.04,6.35 83.57,7.87 v83.57,10.16
A9  (via drill 0.38)
  Top 0.152: U4.1 18.54,34.04 17.78,34.8 v17.78,34.92
  Top 0.254: v11.43,30.99 R20.2
  Bottom 0.254: v17.78,34.92 19.68,36.83 23.37,36.83 24.13,36.07 24.13,30.99 22.86,29.72 12.7,29.72 v11.43,30.99 10.92,31.5 JP28.1
A10  (via drill 0.38)
  Top 0.152: U4.2 21.08,35.31 21.59,34.8 21.59,31.75 v21.46,31.62
  Top 0.254: R19.2 22.23,30.99 21.59,31.62 v21.46,31.62
  Bottom 0.254: v21.46,31.62 21.46,31.5 20.95,30.99 15.24,30.99 14.73,31.5 JP27.1
A11  (via drill 0.38)
  Top 0.152: U4.3 21.08,36.58 v21.59,36.07 22.77,34.89 R18.2
  Bottom 0.254: JP26.1 20.07,32.26 21.59,33.78 v21.59,36.07
A12  (via drill 0.38)
  Top 0.152: U5.1 49.53,34.04 48.77,34.8 v48.77,34.92
  Top 0.254: v42.42,30.99 R25.2
  Bottom 0.254: v48.77,34.92 50.67,36.83 54.36,36.83 55.12,36.07 55.12,30.99 53.85,29.72 43.69,29.72 v42.42,30.99 41.91,31.5 JP35.1
A13  (via drill 0.38)
  Top 0.152: U5.2 52.07,35.31 52.58,34.8 52.58,31.75 v52.45,31.62
  Top 0.254: R24.2 53.21,30.99 52.58,31.62 v52.45,31.62
  Bottom 0.254: v52.45,31.62 52.45,31.5 51.94,30.99 46.23,30.99 45.72,31.5 JP34.1
A14  (via drill 0.38)
  Top 0.152: U5.3 52.07,36.58 v52.58,36.07 53.76,34.89 R23.2
  Bottom 0.254: JP33.1 51.05,32.26 52.58,33.78 v52.58,36.07
A15  (via drill 0.38)
  Top 0.152: U6.1 80.52,34.04 79.76,34.8 v79.76,34.92
  Top 0.254: v73.41,30.99 R30.2
  Bottom 0.254: v79.76,34.92 81.66,36.83 85.34,36.83 86.11,36.07 86.11,30.99 84.84,29.72 74.68,29.72 v73.41,30.99 72.9,31.5 JP42.1
A16  (via drill 0.38)
  Top 0.152: U6.2 83.06,35.31 83.57,34.8 83.57,31.75 v83.44,31.62
  Top 0.254: R29.2 84.2,30.99 83.57,31.62 v83.44,31.62
  Bottom 0.254: v83.44,31.62 83.44,31.5 82.93,30.99 77.22,30.99 76.71,31.5 JP41.1
A17  (via drill 0.38)
  Top 0.152: U6.3 83.06,36.58 v83.57,36.07 84.75,34.89 R28.2
  Bottom 0.254: JP40.1 82.04,32.26 83.57,33.78 v83.57,36.07
A18  (via drill 0.38)
  Top 0.152: U7.1 18.54,59.94 17.78,60.71 v17.78,60.83
  Top 0.254: v11.43,56.9 R35.2
  Bottom 0.254: v17.78,60.83 19.68,62.74 23.37,62.74 24.13,61.98 24.13,56.9 22.86,55.63 12.7,55.63 v11.43,56.9 10.92,57.4 JP49.1
A19  (via drill 0.38)
  Top 0.152: U7.2 21.08,61.21 21.59,60.71 21.59,57.66 v21.46,57.53
  Top 0.254: R34.2 22.23,56.9 21.59,57.53 v21.46,57.53
  Bottom 0.254: v21.46,57.53 21.46,57.4 20.95,56.9 15.24,56.9 14.73,57.4 JP48.1
A20  (via drill 0.38)
  Top 0.152: U7.3 21.08,62.48 v21.59,61.98 22.77,60.79 R33.2
  Bottom 0.254: JP47.1 20.07,58.17 21.59,59.69 v21.59,61.98
A21  (via drill 0.38)
  Top 0.152: U8.1 49.53,59.94 48.77,60.71 v48.77,60.83
  Top 0.254: v42.42,56.9 R40.2
  Bottom 0.254: v48.77,60.83 50.67,62.74 54.36,62.74 55.12,61.98 55.12,56.9 53.85,55.63 43.69,55.63 v42.42,56.9 41.91,57.4 JP56.1
A22  (via drill 0.38)
  Top 0.152: U8.2 52.07,61.21 52.58,60.71 52.58,57.66 v52.45,57.53
  Top 0.254: R39.2 53.21,56.9 52.58,57.53 v52.45,57.53
  Bottom 0.254: v52.45,57.53 52.45,57.4 51.94,56.9 46.23,56.9 45.72,57.4 JP55.1
A23  (via drill 0.38)
  Top 0.152: U8.3 52.07,62.48 v52.58,61.98 53.76,60.79 R38.2
  Bottom 0.254: JP54.1 51.05,58.17 52.58,59.69 v52.58,61.98
A24  (via drill 0.38)
  Top 0.152: U9.1 80.52,59.94 79.76,60.71 v79.76,60.83
  Top 0.254: v73.41,56.9 R45.2
  Bottom 0.254: v79.76,60.83 81.66,62.74 85.34,62.74 86.11,61.98 86.11,56.9 84.84,55.63 74.68,55.63 v73.41,56.9 72.9,57.4 JP63.1
A25  (via drill 0.38)
  Top 0.152: U9.2 83.06,61.21 83.57,60.71 83.57,57.66 v83.44,57.53
  Top 0.254: R44.2 84.2,56.9 83.57,57.53 v83.44,57.53
  Bottom 0.254: v83.44,57.53 83.44,57.4 82.93,56.9 77.22,56.9 76.71,57.4 JP62.1
A26  (via drill 0.38)
  Top 0.152: U9.3 83.06,62.48 v83.57,61.98 84.75,60.79 R43.2
  Bottom 0.254: JP61.1 82.04,58.17 83.57,59.69 v83.57,61.98
GND  (via drill 0.38)
  Top 0.152: J6.3 17.78,21.59 v17.78,17.78
  Bottom 0.152: J6.3 J6.1
  other vias: 3.81,7.62 3.81,15.24 25.4,10.16 6.62,13.97
  pour Bottom (isolate 0.305): 0,0 0,25.4 30.48,25.4 30.48,0
  pour Top (isolate 0.305): 0,0 0,25.4 30.48,25.4 30.48,0
GND1  (via drill 0.38)
  Top 0.152: J13.3 48.77,21.59 v48.77,17.78
  Bottom 0.152: J13.3 J13.1
  other vias: 34.8,7.62 34.8,15.24 56.39,10.16 37.61,13.97
  pour Bottom (isolate 0.305): 30.99,0 30.99,25.4 61.47,25.4 61.47,0
  pour Top (isolate 0.305): 30.99,0 30.99,25.4 61.47,25.4 61.47,0
GND2  (via drill 0.38)
  Top 0.152: J20.3 79.76,21.59 v79.76,17.78
  Bottom 0.152: J20.3 J20.1
  other vias: 65.79,7.62 65.79,15.24 87.38,10.16 68.6,13.97
  pour Bottom (isolate 0.305): 61.98,0 61.98,25.4 92.46,25.4 92.46,0
  pour Top (isolate 0.305): 61.98,0 61.98,25.4 92.46,25.4 92.46,0
GND3  (via drill 0.38)
  Top 0.152: J27.3 17.78,47.5 v17.78,43.69
  Bottom 0.152: J27.3 J27.1
  other vias: 3.81,33.53 3.81,41.15 25.4,36.07 6.62,39.88
  pour Bottom (isolate 0.305): 0,25.91 0,51.31 30.48,51.31 30.48,25.91
  pour Top (isolate 0.305): 0,25.91 0,51.31 30.48,51.31 30.48,25.91
GND4  (via drill 0.38)
  Top 0.152: J34.3 48.77,47.5 v48.77,43.69
  Bottom 0.152: J34.3 J34.1
  other vias: 34.8,33.53 34.8,41.15 56.39,36.07 37.61,39.88
  pour Bottom (isolate 0.305): 30.99,25.91 30.99,51.31 61.47,51.31 61.47,25.91
  pour Top (isolate 0.305): 30.99,25.91 30.99,51.31 61.47,51.31 61.47,25.91
GND5  (via drill 0.38)
  Top 0.152: J41.3 79.76,47.5 v79.76,43.69
  Bottom 0.152: J41.3 J41.1
  other vias: 65.79,33.53 65.79,41.15 87.38,36.07 68.6,39.88
  pour Bottom (isolate 0.305): 61.98,25.91 61.98,51.31 92.46,51.31 92.46,25.91
  pour Top (isolate 0.305): 61.98,25.91 61.98,51.31 92.46,51.31 92.46,25.91
GND6  (via drill 0.38)
  Top 0.152: J48.3 17.78,73.41 v17.78,69.6
  Bottom 0.152: J48.3 J48.1
  other vias: 3.81,59.44 3.81,67.06 25.4,61.98 6.62,65.79
  pour Bottom (isolate 0.305): 0,51.82 0,77.22 30.48,77.22 30.48,51.82
  pour Top (isolate 0.305): 0,51.82 0,77.22 30.48,77.22 30.48,51.82
GND7  (via drill 0.38)
  Top 0.152: J55.3 48.77,73.41 v48.77,69.6
  Bottom 0.152: J55.3 J55.1
  other vias: 34.8,59.44 34.8,67.06 56.39,61.98 37.61,65.79
  pour Bottom (isolate 0.305): 30.99,51.82 30.99,77.22 61.47,77.22 61.47,51.82
  pour Top (isolate 0.305): 30.99,51.82 30.99,77.22 61.47,77.22 61.47,51.82
GND8  (via drill 0.38)
  Top 0.152: J62.3 79.76,73.41 v79.76,69.6
  Bottom 0.152: J62.3 J62.1
  other vias: 65.79,59.44 65.79,67.06 87.38,61.98 68.6,65.79
  pour Bottom (isolate 0.305): 61.98,51.82 61.98,77.22 92.46,77.22 92.46,51.82
  pour Top (isolate 0.305): 61.98,51.82 61.98,77.22 92.46,77.22 92.46,51.82
P0
  Top 0.152: J5.1 25.4,22.86 25.4,16.51 24.13,15.24 24.13,13.97 22.1,11.94 U3.4
P1
  Top 0.152: J5.2 22.86,22.86 22.86,15.24 20.83,13.21 U3.5
P2
  Top 0.152: J5.3 20.32,22.86 20.32,17.98 20.6,17.7 21.4,17.7 22,17.1 22,15.65 20.83,14.48 U3.6
P3
  Top 0.152: U3.7 16.76,15.75 16.51,16 16.51,16.51 15.24,17.78 15.24,22.86 J5.4
P4
  Top 0.152: J5.5 12.7,22.86 12.7,17.78 11.94,17.02 U3.9
P5
  Top 0.152: J5.6 10.16,22.86 10.16,18.16 9,17 9,16.4 9.65,15.75 U3.10
P6
  Top 0.152: J5.7 7.62,22.86 7.62,16.51 9.65,14.48 U3.11
P7
  Top 0.152: J5.8 5.08,22.86 5.08,18.62 5.7,18 5.7,17.16 9.65,13.21 U3.12
P8
  Top 0.152: J12.1 56.39,22.86 56.39,16.51 55.12,15.24 55.12,13.97 53.09,11.94 U1.4
P9
  Top 0.152: J12.3 51.31,22.86 51.31,17.98 51.59,17.7 52.39,17.7 52.99,17.1 52.99,15.65 51.82,14.48 U1.6
P10
  Top 0.152: U1.7 47.75,15.75 47.5,16 47.5,16.51 46.23,17.78 46.23,22.86 J12.4
P11
  Top 0.152: J12.5 43.69,22.86 43.69,17.78 42.93,17.02 U1.9
P12
  Top 0.152: J12.6 41.15,22.86 41.15,18.16 39.99,17 39.99,16.4 40.64,15.75 U1.10
P13
  Top 0.152: J12.7 38.61,22.86 38.61,16.51 40.64,14.48 U1.11
P14
  Top 0.152: J12.8 36.07,22.86 36.07,18.62 36.69,18 36.69,17.16 40.64,13.21 U1.12
P15
  Top 0.152: J12.2 53.85,22.86 53.85,15.24 51.82,13.21 U1.5
P16
  Top 0.152: J19.1 87.38,22.86 87.38,16.51 86.11,15.24 86.11,13.97 84.07,11.94 U2.4
P17
  Top 0.152: J19.3 82.3,22.86 82.3,17.98 82.58,17.7 83.38,17.7 83.98,17.1 83.98,15.65 82.8,14.48 U2.6
P18
  Top 0.152: U2.7 78.74,15.75 78.49,16 78.49,16.51 77.22,17.78 77.22,22.86 J19.4
P19
  Top 0.152: J19.5 74.68,22.86 74.68,17.78 73.91,17.02 U2.9
P20
  Top 0.152: J19.6 72.14,22.86 72.14,18.16 70.98,17 70.98,16.4 71.63,15.75 U2.10
P21
  Top 0.152: J19.7 69.6,22.86 69.6,16.51 71.63,14.48 U2.11
P22
  Top 0.152: J19.8 67.06,22.86 67.06,18.62 67.68,18 67.68,17.16 71.63,13.21 U2.12
P23
  Top 0.152: J19.2 84.84,22.86 84.84,15.24 82.8,13.21 U2.5
P24
  Top 0.152: J26.1 25.4,48.77 25.4,42.42 24.13,41.15 24.13,39.88 22.1,37.85 U4.4
P25
  Top 0.152: J26.3 20.32,48.77 20.32,43.89 20.6,43.61 21.4,43.61 22,43.01 22,41.56 20.83,40.39 U4.6
P26
  Top 0.152: U4.7 16.76,41.66 16.51,41.91 16.51,42.42 15.24,43.69 15.24,48.77 J26.4
P27
  Top 0.152: J26.5 12.7,48.77 12.7,43.69 11.94,42.93 U4.9
P28
  Top 0.152: J26.6 10.16,48.77 10.16,44.07 9,42.91 9,42.31 9.65,41.66 U4.10
P29
  Top 0.152: J26.7 7.62,48.77 7.62,42.42 9.65,40.39 U4.11
P30
  Top 0.152: J26.8 5.08,48.77 5.08,44.53 5.7,43.91 5.7,43.07 9.65,39.12 U4.12
P31
  Top 0.152: J26.2 22.86,48.77 22.86,41.15 20.83,39.12 U4.5
P32
  Top 0.152: J33.1 56.39,48.77 56.39,42.42 55.12,41.15 55.12,39.88 53.09,37.85 U5.4
P33
  Top 0.152: J33.3 51.31,48.77 51.31,43.89 51.59,43.61 52.39,43.61 52.99,43.01 52.99,41.56 51.82,40.39 U5.6
P34
  Top 0.152: U5.7 47.75,41.66 47.5,41.91 47.5,42.42 46.23,43.69 46.23,48.77 J33.4
P35
  Top 0.152: J33.5 43.69,48.77 43.69,43.69 42.93,42.93 U5.9
P36
  Top 0.152: J33.6 41.15,48.77 41.15,44.07 39.99,42.91 39.99,42.31 40.64,41.66 U5.10
P37
  Top 0.152: J33.7 38.61,48.77 38.61,42.42 40.64,40.39 U5.11
P38
  Top 0.152: J33.8 36.07,48.77 36.07,44.53 36.69,43.91 36.69,43.07 40.64,39.12 U5.12
P39
  Top 0.152: J33.2 53.85,48.77 53.85,41.15 51.82,39.12 U5.5
P40
  Top 0.152: J40.1 87.38,48.77 87.38,42.42 86.11,41.15 86.11,39.88 84.07,37.85 U6.4
P41
  Top 0.152: J40.3 82.3,48.77 82.3,43.89 82.58,43.61 83.38,43.61 83.98,43.01 83.98,41.56 82.8,40.39 U6.6
P42
  Top 0.152: U6.7 78.74,41.66 78.49,41.91 78.49,42.42 77.22,43.69 77.22,48.77 J40.4
P43
  Top 0.152: J40.5 74.68,48.77 74.68,43.69 73.91,42.93 U6.9
P44
  Top 0.152: J40.6 72.14,48.77 72.14,44.07 70.98,42.91 70.98,42.31 71.63,41.66 U6.10
P45
  Top 0.152: J40.7 69.6,48.77 69.6,42.42 71.63,40.39 U6.11
P46
  Top 0.152: J40.8 67.06,48.77 67.06,44.53 67.68,43.91 67.68,43.07 71.63,39.12 U6.12
P47
  Top 0.152: J40.2 84.84,48.77 84.84,41.15 82.8,39.12 U6.5
P48
  Top 0.152: J47.1 25.4,74.68 25.4,68.33 24.13,67.06 24.13,65.79 22.1,63.75 U7.4
P49
  Top 0.152: J47.3 20.32,74.68 20.32,69.8 20.6,69.52 21.4,69.52 22,68.92 22,67.47 20.83,66.29 U7.6
P50
  Top 0.152: U7.7 16.76,67.56 16.51,67.82 16.51,68.33 15.24,69.6 15.24,74.68 J47.4
P51
  Top 0.152: J47.5 12.7,74.68 12.7,69.6 11.94,68.83 U7.9
P52
  Top 0.152: J47.6 10.16,74.68 10.16,69.98 9,68.82 9,68.22 9.65,67.56 U7.10
P53
  Top 0.152: J47.7 7.62,74.68 7.62,68.33 9.65,66.29 U7.11
P54
  Top 0.152: J47.8 5.08,74.68 5.08,70.44 5.7,69.82 5.7,68.98 9.65,65.02 U7.12
P55
  Top 0.152: J47.2 22.86,74.68 22.86,67.06 20.83,65.02 U7.5
P56
  Top 0.152: J54.1 56.39,74.68 56.39,68.33 55.12,67.06 55.12,65.79 53.09,63.75 U8.4
P57
  Top 0.152: J54.3 51.31,74.68 51.31,69.8 51.59,69.52 52.39,69.52 52.99,68.92 52.99,67.47 51.82,66.29 U8.6
P58
  Top 0.152: U8.7 47.75,67.56 47.5,67.82 47.5,68.33 46.23,69.6 46.23,74.68 J54.4
P59
  Top 0.152: J54.5 43.69,74.68 43.69,69.6 42.93,68.83 U8.9
P60
  Top 0.152: J54.6 41.15,74.68 41.15,69.98 39.99,68.82 39.99,68.22 40.64,67.56 U8.10
P61
  Top 0.152: J54.7 38.61,74.68 38.61,68.33 40.64,66.29 U8.11
P62
  Top 0.152: J54.8 36.07,74.68 36.07,70.44 36.69,69.82 36.69,68.98 40.64,65.02 U8.12
P63
  Top 0.152: J54.2 53.85,74.68 53.85,67.06 51.82,65.02 U8.5
P64
  Top 0.152: J61.1 87.38,74.68 87.38,68.33 86.11,67.06 86.11,65.79 84.07,63.75 U9.4
P65
  Top 0.152: J61.3 82.3,74.68 82.3,69.8 82.58,69.52 83.38,69.52 83.98,68.92 83.98,67.47 82.8,66.29 U9.6
P66
  Top 0.152: U9.7 78.74,67.56 78.49,67.82 78.49,68.33 77.22,69.6 77.22,74.68 J61.4
P67
  Top 0.152: J61.5 74.68,74.68 74.68,69.6 73.91,68.83 U9.9
P68
  Top 0.152: J61.6 72.14,74.68 72.14,69.98 70.98,68.82 70.98,68.22 71.63,67.56 U9.10
P69
  Top 0.152: J61.7 69.6,74.68 69.6,68.33 71.63,66.29 U9.11
P70
  Top 0.152: J61.8 67.06,74.68 67.06,70.44 67.68,69.82 67.68,68.98 71.63,65.02 U9.12
P71
  Top 0.152: J61.2 84.84,74.68 84.84,67.06 82.8,65.02 U9.5
SCL  (via drill 0.38)
  Top 0.152: R4.1 4.8,18.2 5,18 5,16.26 v5.08,16.18 | J2.4 v6.35,11.2 6.58,11.2 7.11,10.67 U3.14 13.46,10.67 v14.35,9.78 17.78,6.35 J3.4
  Top 0.254: J4.4 26.77,14.2 v27.3,14.73
  Bottom 0.152: v5.08,16.18 5.08,11.43 6.12,11.43 v6.35,11.2 | 17.78,14.61 17.14,14.61 14.35,11.81 v14.35,9.78 | 17.78,14.61 27.18,14.61 v27.3,14.73 | v17.78,16.51 17.78,14.61
SCL1  (via drill 0.38)
  Top 0.152: R7.1 35.79,18.2 35.99,18 35.99,16.26 v36.07,16.18 | J8.4 v37.34,11.2 37.57,11.2 38.1,10.67 U1.14 44.45,10.67 v45.34,9.78 48.77,6.35 J9.4
  Top 0.254: J10.4 57.76,14.2 v58.29,14.73
  Bottom 0.152: v36.07,16.18 36.07,11.43 37.11,11.43 v37.34,11.2 | 48.77,14.61 48.13,14.61 45.34,11.81 v45.34,9.78 | 48.77,14.61 58.17,14.61 v58.29,14.73 | v48.77,16.51 48.77,14.61
SCL2  (via drill 0.38)
  Top 0.152: R12.1 66.78,18.2 66.98,18 66.98,16.26 v67.06,16.18 | J15.4 v68.33,11.2 68.56,11.2 69.09,10.67 U2.14 75.44,10.67 v76.33,9.78 79.76,6.35 J16.4
  Top 0.254: J17.4 88.75,14.2 v89.28,14.73
  Bottom 0.152: v67.06,16.18 67.06,11.43 68.1,11.43 v68.33,11.2 | 79.76,14.61 79.12,14.61 76.33,11.81 v76.33,9.78 | 79.76,14.61 89.15,14.61 v89.28,14.73 | v79.76,16.51 79.76,14.61
SCL3  (via drill 0.38)
  Top 0.152: R17.1 4.8,44.11 5,43.91 5,42.17 v5.08,42.09 | J22.4 v6.35,37.11 6.58,37.11 7.11,36.58 U4.14 13.46,36.58 v14.35,35.69 17.78,32.26 J23.4
  Top 0.254: J24.4 26.77,40.11 v27.3,40.64
  Bottom 0.152: v5.08,42.09 5.08,37.34 6.12,37.34 v6.35,37.11 | 17.78,40.51 17.14,40.51 14.35,37.72 v14.35,35.69 | 17.78,40.51 27.18,40.51 v27.3,40.64 | v17.78,42.42 17.78,40.51
SCL4  (via drill 0.38)
  Top 0.152: R22.1 35.79,44.11 35.99,43.91 35.99,42.17 v36.07,42.09 | J29.4 v37.34,37.11 37.57,37.11 38.1,36.58 U5.14 44.45,36.58 v45.34,35.69 48.77,32.26 J30.4
  Top 0.254: J31.4 57.76,40.11 v58.29,40.64
  Bottom 0.152: v36.07,42.09 36.07,37.34 37.11,37.34 v37.34,37.11 | 48.77,40.51 48.13,40.51 45.34,37.72 v45.34,35.69 | 48.77,40.51 58.17,40.51 v58.29,40.64 | v48.77,42.42 48.77,40.51
SCL5  (via drill 0.38)
  Top 0.152: R27.1 66.78,44.11 66.98,43.91 66.98,42.17 v67.06,42.09 | J36.4 v68.33,37.11 68.56,37.11 69.09,36.58 U6.14 75.44,36.58 v76.33,35.69 79.76,32.26 J37.4
  Top 0.254: J38.4 88.75,40.11 v89.28,40.64
  Bottom 0.152: v67.06,42.09 67.06,37.34 68.1,37.34 v68.33,37.11 | 79.76,40.51 79.12,40.51 76.33,37.72 v76.33,35.69 | 79.76,40.51 89.15,40.51 v89.28,40.64 | v79.76,42.42 79.76,40.51
SCL6  (via drill 0.38)
  Top 0.152: R32.1 4.8,70.02 5,69.82 5,68.08 v5.08,68 | J43.4 v6.35,63.02 6.58,63.02 7.11,62.48 U7.14 13.46,62.48 v14.35,61.59 17.78,58.17 J44.4
  Top 0.254: J45.4 26.77,66.02 v27.3,66.55
  Bottom 0.152: v5.08,68 5.08,63.25 6.12,63.25 v6.35,63.02 | 17.78,66.42 17.14,66.42 14.35,63.63 v14.35,61.59 | 17.78,66.42 27.18,66.42 v27.3,66.55 | v17.78,68.33 17.78,66.42
SCL7  (via drill 0.38)
  Top 0.152: R37.1 35.79,70.02 35.99,69.82 35.99,68.08 v36.07,68 | J50.4 v37.34,63.02 37.57,63.02 38.1,62.48 U8.14 44.45,62.48 v45.34,61.59 48.77,58.17 J51.4
  Top 0.254: J52.4 57.76,66.02 v58.29,66.55
  Bottom 0.152: v36.07,68 36.07,63.25 37.11,63.25 v37.34,63.02 | 48.77,66.42 48.13,66.42 45.34,63.63 v45.34,61.59 | 48.77,66.42 58.17,66.42 v58.29,66.55 | v48.77,68.33 48.77,66.42
SCL8  (via drill 0.38)
  Top 0.152: R42.1 66.78,70.02 66.98,69.82 66.98,68.08 v67.06,68 | J57.4 v68.33,63.02 68.56,63.02 69.09,62.48 U9.14 75.44,62.48 v76.33,61.59 79.76,58.17 J58.4
  Top 0.254: J59.4 88.75,66.02 v89.28,66.55
  Bottom 0.152: v67.06,68 67.06,63.25 68.1,63.25 v68.33,63.02 | 79.76,66.42 79.12,66.42 76.33,63.63 v76.33,61.59 | 79.76,66.42 89.15,66.42 v89.28,66.55 | v79.76,68.33 79.76,66.42
SCL_PU1
  Top 0.152: SJ5.1 1.73,21.16 1.27,20.7 R2.2
SCL_PU2
  Top 0.152: SJ1.1 32.72,21.16 32.26,20.7 R6.2
SCL_PU3
  Top 0.152: SJ2.1 63.7,21.16 63.25,20.7 R11.2
SCL_PU4
  Top 0.152: SJ3.1 1.73,47.07 1.27,46.61 R16.2
SCL_PU5
  Top 0.152: SJ4.1 32.72,47.07 32.26,46.61 R21.2
SCL_PU6
  Top 0.152: SJ6.1 63.7,47.07 63.25,46.61 R26.2
SCL_PU7
  Top 0.152: SJ7.1 1.73,72.97 1.27,72.52 R31.2
SCL_PU8
  Top 0.152: SJ8.1 32.72,72.97 32.26,72.52 R36.2
SCL_PU9
  Top 0.152: SJ9.1 63.7,72.97 63.25,72.52 R41.2
SDA  (via drill 0.38)
  Top 0.152: J2.3 4.07,12.2 3.81,11.94 v3.81,11.43 3.81,10.16 4.57,9.4 U3.15 13.46,9.4 v13.97,8.89 13.97,5.08 15.24,3.81 J3.3 | R2.1 v1.27,17.02
  Top 0.254: J4.3 27.31,13.2 v27.43,13.08
  Bottom 0.152: v1.27,17.02 1.27,12.7 2.54,11.43 v3.81,11.43
  Bottom 0.254: v27.43,13.08 19.43,13.08 14.86,8.51 14.35,8.51 v13.97,8.89
SDA1  (via drill 0.38)
  Top 0.152: J8.3 35.06,12.2 34.8,11.94 v34.8,11.43 34.8,10.16 35.56,9.4 U1.15 44.45,9.4 v44.96,8.89 44.96,5.08 46.23,3.81 J9.3 | R6.1 v32.26,17.02
  Top 0.254: J10.3 58.3,13.2 v58.42,13.08
  Bottom 0.152: v32.26,17.02 32.26,12.7 33.53,11.43 v34.8,11.43
  Bottom 0.254: v58.42,13.08 50.42,13.08 45.85,8.51 45.34,8.51 v44.96,8.89
SDA2  (via drill 0.38)
  Top 0.152: J15.3 66.05,12.2 65.79,11.94 v65.79,11.43 65.79,10.16 66.55,9.4 U2.15 75.44,9.4 v75.95,8.89 75.95,5.08 77.22,3.81 J16.3 | R11.1 v63.25,17.02
  Top 0.254: J17.3 89.29,13.2 v89.41,13.08
  Bottom 0.152: v63.25,17.02 63.25,12.7 64.52,11.43 v65.79,11.43
  Bottom 0.254: v89.41,13.08 81.41,13.08 76.83,8.51 76.33,8.51 v75.95,8.89
SDA3  (via drill 0.38)
  Top 0.152: J22.3 4.07,38.11 3.81,37.85 v3.81,37.34 3.81,36.07 4.57,35.31 U4.15 13.46,35.31 v13.97,34.8 13.97,30.99 15.24,29.72 J23.3 | R16.1 v1.27,42.93
  Top 0.254: J24.3 27.31,39.11 v27.43,38.99
  Bottom 0.152: v1.27,42.93 1.27,38.61 2.54,37.34 v3.81,37.34
  Bottom 0.254: v27.43,38.99 19.43,38.99 14.86,34.42 14.35,34.42 v13.97,34.8
SDA4  (via drill 0.38)
  Top 0.152: J29.3 35.06,38.11 34.8,37.85 v34.8,37.34 34.8,36.07 35.56,35.31 U5.15 44.45,35.31 v44.96,34.8 44.96,30.99 46.23,29.72 J30.3 | R21.1 v32.26,42.93
  Top 0.254: J31.3 58.3,39.11 v58.42,38.99
  Bottom 0.152: v32.26,42.93 32.26,38.61 33.53,37.34 v34.8,37.34
  Bottom 0.254: v58.42,38.99 50.42,38.99 45.85,34.42 45.34,34.42 v44.96,34.8
SDA5  (via drill 0.38)
  Top 0.152: J36.3 66.05,38.11 65.79,37.85 v65.79,37.34 65.79,36.07 66.55,35.31 U6.15 75.44,35.31 v75.95,34.8 75.95,30.99 77.22,29.72 J37.3 | R26.1 v63.25,42.93
  Top 0.254: J38.3 89.29,39.11 v89.41,38.99
  Bottom 0.152: v63.25,42.93 63.25,38.61 64.52,37.34 v65.79,37.34
  Bottom 0.254: v89.41,38.99 81.41,38.99 76.83,34.42 76.33,34.42 v75.95,34.8
SDA6  (via drill 0.38)
  Top 0.152: J43.3 4.07,64.02 3.81,63.75 v3.81,63.25 3.81,61.98 4.57,61.21 U7.15 13.46,61.21 v13.97,60.71 13.97,56.9 15.24,55.63 J44.3 | R31.1 v1.27,68.83
  Top 0.254: J45.3 27.31,65.02 v27.43,64.9
  Bottom 0.152: v1.27,68.83 1.27,64.52 2.54,63.25 v3.81,63.25
  Bottom 0.254: v27.43,64.9 19.43,64.9 14.86,60.33 14.35,60.33 v13.97,60.71
SDA7  (via drill 0.38)
  Top 0.152: J50.3 35.06,64.02 34.8,63.75 v34.8,63.25 34.8,61.98 35.56,61.21 U8.15 44.45,61.21 v44.96,60.71 44.96,56.9 46.23,55.63 J51.3 | R36.1 v32.26,68.83
  Top 0.254: J52.3 58.3,65.02 v58.42,64.9
  Bottom 0.152: v32.26,68.83 32.26,64.52 33.53,63.25 v34.8,63.25
  Bottom 0.254: v58.42,64.9 50.42,64.9 45.85,60.33 45.34,60.33 v44.96,60.71
SDA8  (via drill 0.38)
  Top 0.152: J57.3 66.05,64.02 65.79,63.75 v65.79,63.25 65.79,61.98 66.55,61.21 U9.15 75.44,61.21 v75.95,60.71 75.95,56.9 77.22,55.63 J58.3 | R41.1 v63.25,68.83
  Top 0.254: J59.3 89.29,65.02 v89.41,64.9
  Bottom 0.152: v63.25,68.83 63.25,64.52 64.52,63.25 v65.79,63.25
  Bottom 0.254: v89.41,64.9 81.41,64.9 76.83,60.33 76.33,60.33 v75.95,60.71
SDA_PU1
  Top 0.152: SJ5.3 3.35,21.16 3.81,20.7 R4.2
SDA_PU2
  Top 0.152: SJ1.3 34.34,21.16 34.8,20.7 R7.2
SDA_PU3
  Top 0.152: SJ2.3 65.33,21.16 65.79,20.7 R12.2
SDA_PU4
  Top 0.152: SJ3.3 3.35,47.07 3.81,46.61 R17.2
SDA_PU5
  Top 0.152: SJ4.3 34.34,47.07 34.8,46.61 R22.2
SDA_PU6
  Top 0.152: SJ6.3 65.33,47.07 65.79,46.61 R27.2
SDA_PU7
  Top 0.152: SJ7.3 3.35,72.97 3.81,72.52 R32.2
SDA_PU8
  Top 0.152: SJ8.3 34.34,72.97 34.8,72.52 R37.2
SDA_PU9
  Top 0.152: SJ9.3 65.33,72.97 65.79,72.52 R42.2